# Altium PCB PCB1.PcbDoc
Units mil, origin at the board's own origin, x right, y up, seen from the top; angles counter-clockwise.
Board outline 6000 x 4000 mil, 2 copper layers (Top Layer, Bottom Layer); 80 components, 58 nets, 267 pads, 0 vias.
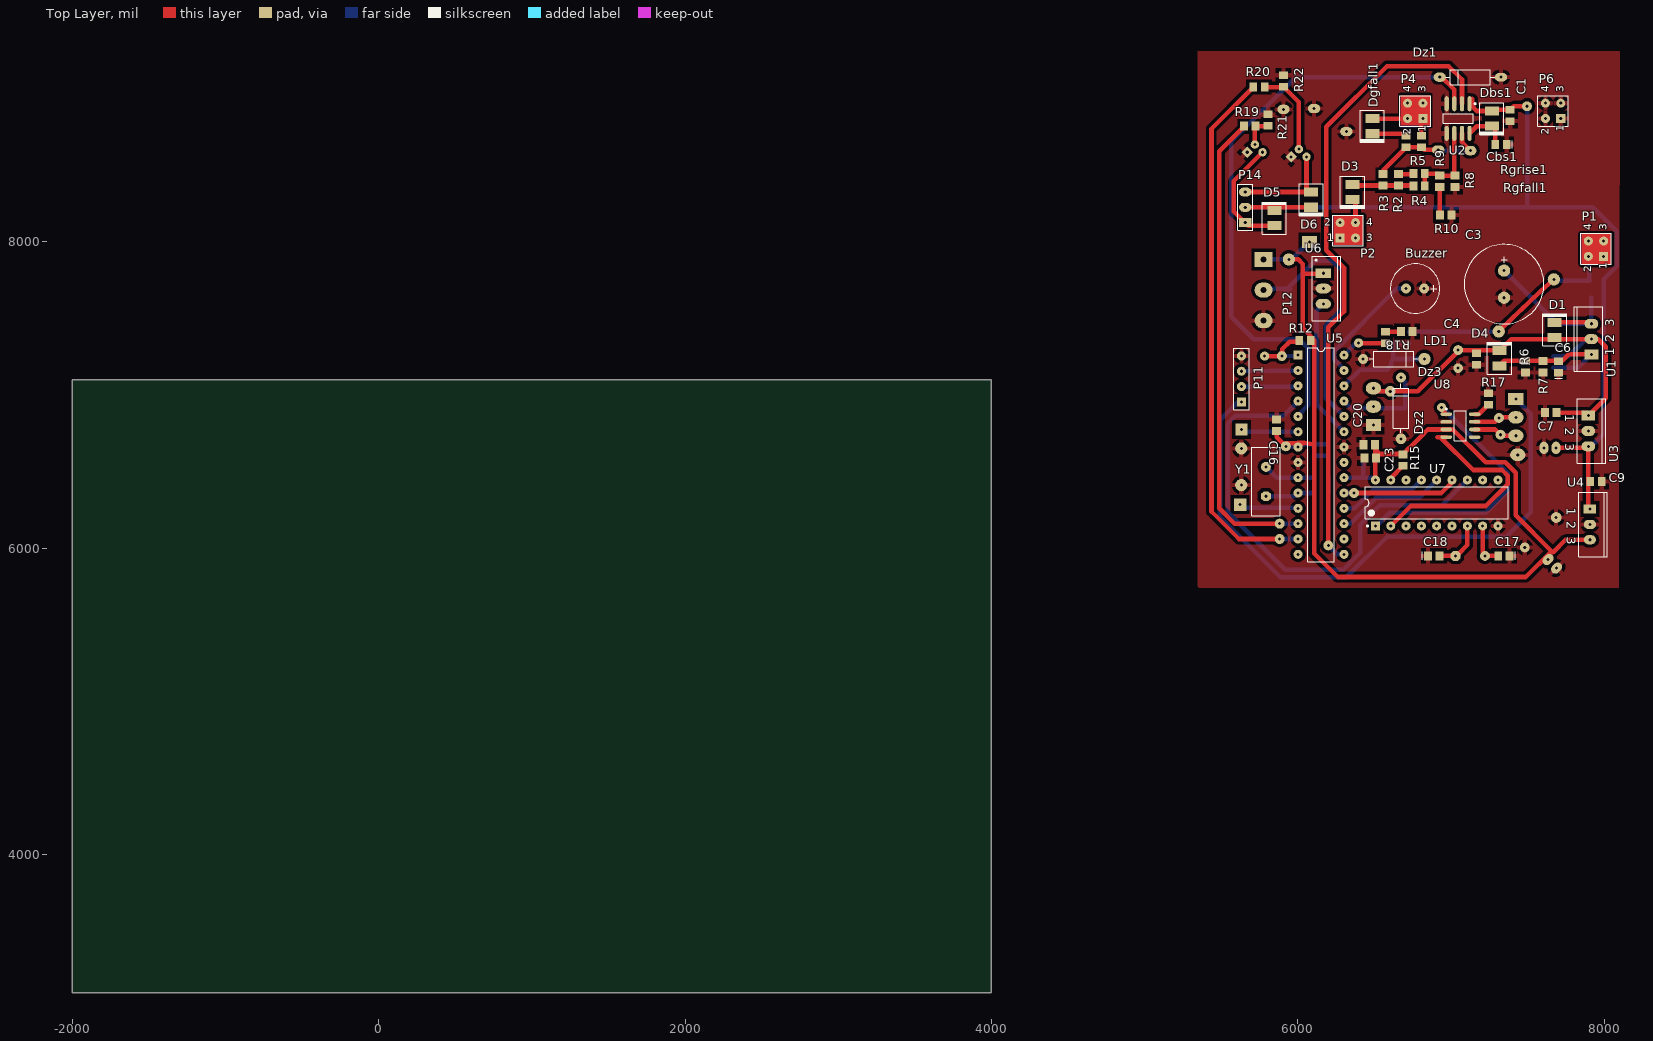
[diagram p0: Top Layer view]
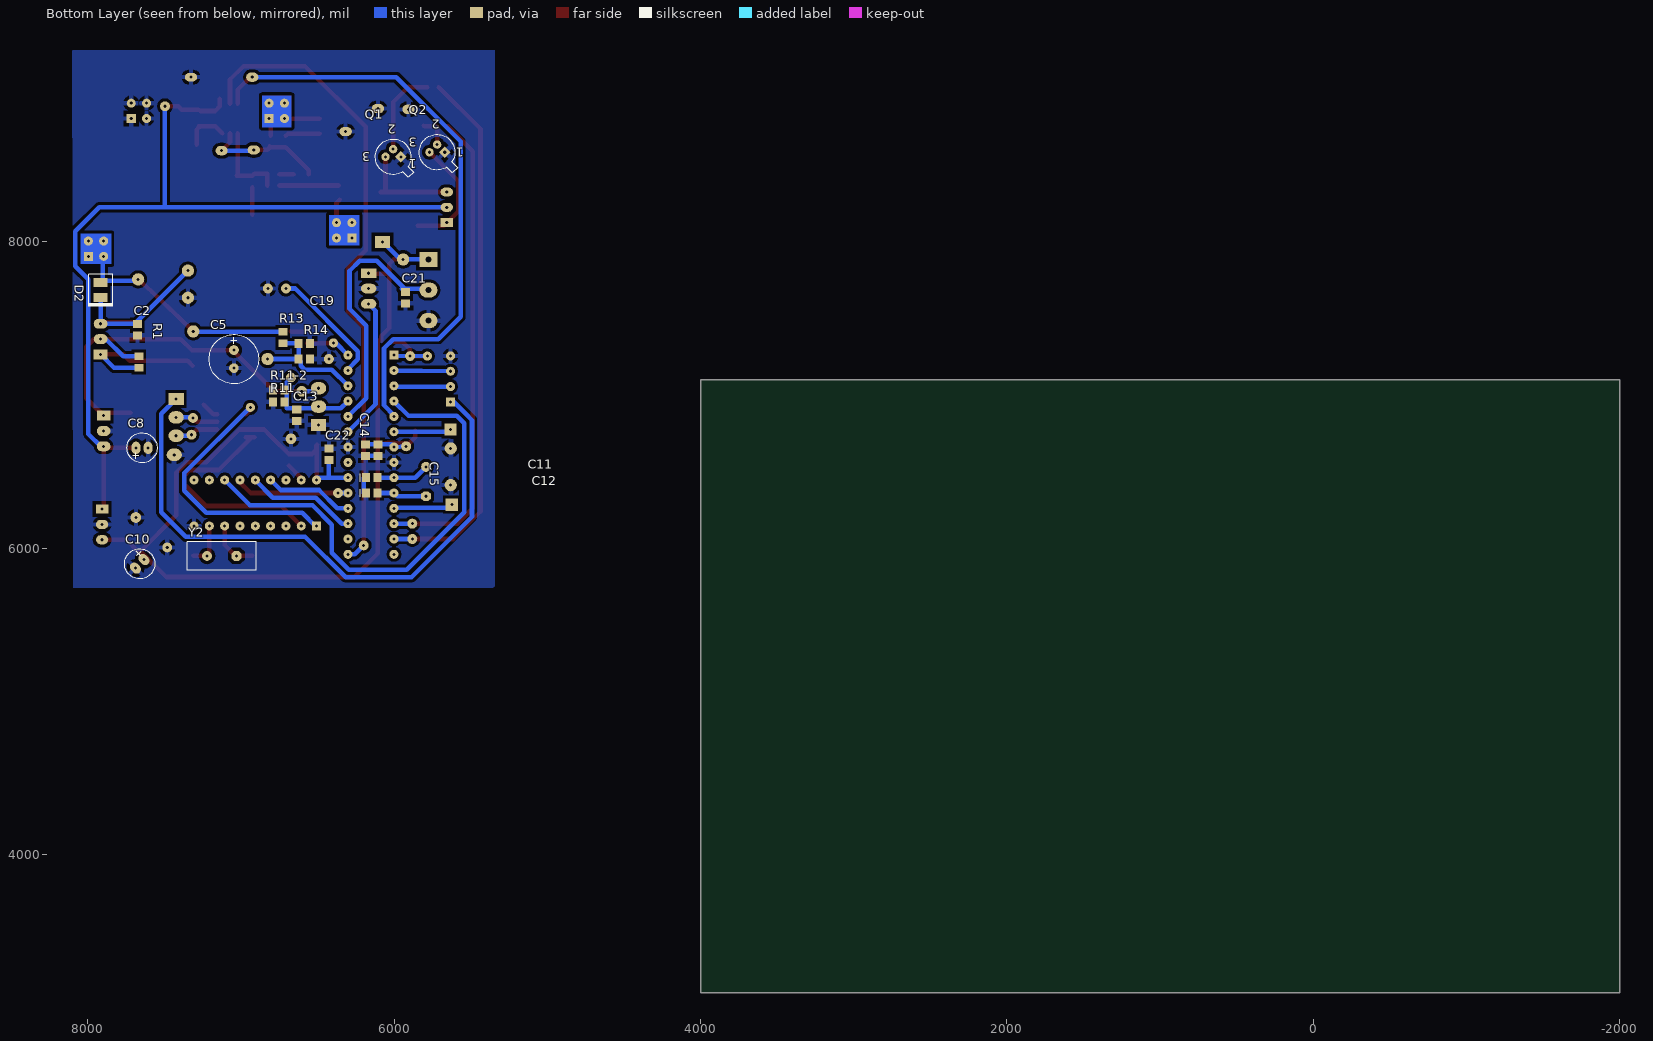
[diagram p1: Bottom Layer view, seen from below]

## Layer stack, top to bottom
Top Layer: signal copper 1.4
Dielectric: dielectric 12.6, FR-4, Dk 4.8
Bottom Layer: signal copper 1.4

## Board outline
-2000.86,3098.13 3999.14,3098.13 3999.14,7098.13 -2000.86,7098.13

## Design rules (kind name [scope] priority, off if disabled: settings)
Clearance [All] p1: gap=20
Height [All] p1: minheight=0 maxheight=10000 prefheight=500
HoleSize [All] p1: absolutevalues=TRUE maxlimit=100 minlimit=20 maxpercent=80.000 minpercent=20.000
PolygonConnect [All] p1: connectstyle=Relief reliefconductorwidth=30 reliefentries=4 polygonreliefangle="90 Angle"
RoutingVias [All] p1: holewidth=28 width=50 viastyle="Through Hole" minholewidth=28 minwidth=50 maxholewidth=28 maxwidth=50
SilkToSilkClearance [All] p1: silktosilkclearance=0
SilkscreenOverComponentPads [All] p1: minsilkscreentomaskgap=0
SolderMaskExpansion [All] p1: expansion=4
Width [All] p1: maxlimit=30 minlimit=30 preferedwidth=30 minimp=50.000000 maximp=50.000000 favimp=50.000000
24 further rules are at their usual default settings.

## Components (designator, comment, footprint, x,y, rotation, side; value= is the part's Value field where it differs from the comment)
Buzzer "Buzzer" CapEltr-Rad4.1-Dpp3.0#1 6707.09,7695 r0 top
C1 "Cap" 6-0805 7387.09,8825 r270 top
C2 "Cap" 6-0805 7677.09,7425 r90 bottom
C3 "Cap" CapEltr-Rad6.6-Dpp4.5 7347.09,7635 r90 top
C4 "Cap" 6-0805 7167.09,7235 r90 top
C5 "Cap" CapEltr-Rad4.1-Dpp3.0#2 7047.09,7175 r90 bottom
C6 "Cap" 0805 7702.58,7182.83 r90 top
C7 "Eltr" 6-0805 7652.29,6884.98 r0 top
C8 "Cer" 1u25v 7607.09,6655 r0 bottom
C9 "Eltr" 6-0805 7947.09,6435 r180 top
C10 "Cer" 1u25v 7690,5870 r135 bottom
C11 "Cap" 0805 6147.09,6460 r180 bottom
C12 "Cap" 0805 6147.09,6360 r180 bottom
C13 "Cap" 6-0805 6636.62,6866.81 r270 bottom
C14 "Cap" 6-0805 6187.09,6640 r270 bottom
C15 "Cap" 6-0805 6107.09,6640 r270 bottom
C16 "Cap" 6-0805 5862.58,6802.83 r90 top
C17 "Cap" 0805 7346.14,5949.45 r180 top
C18 "Cap" 0805 6888.73,5949.45 r0 top
C19 "Cap" 6-0805 6587.09,7235 r180 bottom
C20 "Cap" 6-0805 6467.09,6675 r0 top
C21 "Cap" 6-0805 5927.09,7635 r270 bottom
C22 "Cap" 6-0805 6427.09,6612.4 r270 bottom
C23 "Cap" 6-0805 6472.57,6588.19 r0 top
Cbs1 "Cer" C0805 7327.09,8635 r180 top
D1 "BYD77" SOD87 7677.09,7425 r90 top
D2 "Diode 1N4002" SOD87 7917.09,7685 r270 bottom
D3 "BYD77" SOD87 6357.09,8325 r270 top
D4 "1N4002" SOD87 7317.09,7240 r90 top
D5 "1N4002" SOD87 5847.09,8155 r90 top
D6 "1N4002" SOD87 6087.09,8275 r270 top
Dbs1 "" SOD87 7267.09,8805 r270 top
Dgfall1 "BYD77" SOD87 6487.09,8755 r270 top
Dz1 "5V" diode-0.4#1 7127.09,9075 r180 top
Dz2 "5V" diode-0.4#2 6673.97,6913.98 r90 top
Dz3 "5V" DIODE-0.4 6627.09,7235 r0 top
LD1 "RED" 6-0805 6712.09,7415 r0 top
P1 "Header 2X2" HDR2X2 7997.09,7905 r90 top
P2 "Header 2X2" HDR2X2 6277.09,8025 r0 top
P4 "Header 2X2" HDR2X2 6817.09,8805 r90 top
P6 "Header 2X2" HDR2X2 7717.09,8805 r90 top
P11 "UART" HDR1X4 5632.09,6955 r90 top
P12 "WE-Terminal Blocks Screw Type 691103110003" t-block 5777.09,7685 r270 top
P14 "POWER RElAY" HDR1X3 5657.09,8125 r90 top
Q1 "2N2222" 22-03 6007.09,8555 r0 bottom
Q2 "2N2222" 22-03 5720.1,8585 r0 bottom
R1 "Res1" 6-0805 7667.09,7215 r270 bottom
R2 "1%" 6-0805 6657.09,8405 r90 top
R3 "1%" 6-0805 6557.09,8405 r90 top
R4 "1%" 6-0805 6792.09,8365 r0 top
R5 "1%" 6-0805 6792.09,8445 r0 top
R6 "Res1" 6-0805 7487.09,7185 r90 top
R7 "Res1" 6-0805 7602.09,7185 r90 top
R8 "1%" 6-0805 7027.09,8395 r270 top
R9 "1%" 6-0805 6927.09,8395 r270 top
R10 "1%" 6-0805 6967.09,8175 r180 top
R11 "Res1" 6-0805 6753.5,6955 r0 bottom
R11-2 "Res1" 6-0805 6753.97,7033.98 r0 bottom
R12 "Res1" 6-0805 6047.09,7355 r0 top
R13 "Res1" 6-0805 6727.09,7375 r270 bottom
R14 "Res1" 6-0805 6587.09,7335 r180 bottom
R15 "Res1" 6-0805 6687.09,6575 r270 top
R17 "Res1" 6-0805 7243.97,6973.98 r270 top
R18 "Res1" 6-0805 6572.09,7375 r270 top
R19 "Res1" 6-0805 5687.09,8755 r0 top
R20 "Res1" 6-0805 5747.09,9010 r180 top
R21 "Res1" 6-0805 5807.09,8795 r270 top
R22 "Res1" 6-0805 5907.09,9050 r270 top
Rgfall1 "Res1" 6-0805 6707.09,8655 r270 top
Rgrise1 "Res1" 6-0805 6807.09,8655 r270 top
U1 "LM317" TO-220AB#1 7917.09,7365 r90 top
U2 "IR2127S" SO8_M 7047.09,8805 r270 top
U3 "LM7815" TO-220AB#1 7897.09,6765 r270 top
U4 "LM7805" TO-220AB#2 7907.09,6155 r270 top
U5 "ATmega328p" 28P3 6152.09,6610 r270 top
U6 "LM35DT" TA03F 6167.09,7695 r270 top
U7 "MCP2515-E/P" PDIP300-P18 6907.09,6295 r90 top
U8 "MCP2551-E/P" SOIC-SN8_L 7062.09,6800 r0 top
Y1 "16MHz" BCY-W2/E4.7 5792.09,6435 r90 top
Y2 "16MHz" BCY-W2/E4.7 7126.14,5949.45 r0 bottom

## Footprints (in the part's own frame and the unit in brackets; to place one, negate y for a bottom-side part, rotate by r counter-clockwise, add the part's x,y. Pads: shape width x height; smd on the part's side, far side on the other; paste and mask are expansions set on the pad)
1u25v [mil]
  oval 58x80 hole 20: 1(0,0) 2(78.74,0)
  silkscreen extent -59,-98 138,98
6-0805 [mm] "Chip Resistor; Body 2 x 1.2 mm (LxW typ)"
  rect 1.3x1.5 smd: 1(-0.95,0) 2(0.95,0)
22-03 [mm] "Can; 3 Leads; Pin Circle Dia. 2.54 mm; Lead Dia. 0.48 mm (max)"
  rect 1.4x1.4 hole 0.508 rot 45: 1(-1.27,0)
  round 1.4 hole 0.508: 2(0,-1.27) 3(1.27,0)
  silkscreen extent -3.39,-2.95 2.95,3.39
28P3 [mm] "DIP; 28 Leads; Row Spacing 7.62 mm; Pitch 2.54 mm"
  rect 1.5x1.5 hole 0.508: 1(-16.51,-3.81)
  round 1.5 hole 0.508: 2(-13.97,-3.81) 3(-11.43,-3.81) 4(-8.89,-3.81) 5(-6.35,-3.81) 6(-3.81,-3.81) 7(-1.27,-3.81) 8(1.27,-3.81) 9(3.81,-3.81) 10(6.35,-3.81) 11(8.89,-3.81) 12(11.43,-3.81) 13(13.97,-3.81) 14(16.51,-3.81) 15(16.51,3.81) 16(13.97,3.81) 17(11.43,3.81) 18(8.89,3.81) 19(6.35,3.81) 20(3.81,3.81) 21(1.27,3.81) 22(-1.27,3.81) 23(-3.81,3.81) 24(-6.35,3.81) 25(-8.89,3.81) 26(-11.43,3.81) 27(-13.97,3.81) 28(-16.51,3.81)
  silkscreen extent -17.78,-2.23 17.78,2.23
0805 [mm] "Chip Capacitor; Body 2.0 x 1.2 mm (LxW typ)"
  rect 1.3x1.5 smd: 1(-0.95,0) 2(0.95,0)
  silkscreen extent -1.9,-0.65 -1.9,0.65
BCY-W2/E4.7 [mil] "Quartz Crystal, Thru-Hole; 2 Leads; Body 11.35 x 4.65 x 13.46 mm (LxWxH max)"
  oct 65x65 hole 20: 1(-96.06,0)
  round 65 hole 20: 2(96.06,0)
  silkscreen extent -224,-93 224,93
C0805 [mm] "Chip Capacitor; Body 2.0 x 1.2 mm (LxW typ)"
  rect 1.3x1.5 smd: 1(-0.95,0) 2(0.95,0)
  silkscreen extent -1.9,-0.65 -1.9,0.65
CapEltr-Rad4.1-Dpp3.0#1 [mil] "Capacitor Eletrolitico Radial 4.1mm com 3.0mm entre pinos"
  round 65 hole 20: 1(0,0) 2(118.11,0)
  silkscreen extent -102,-161 220,161
CapEltr-Rad4.1-Dpp3.0#2 [mil] "Capacitor Eletrolitico Radial 4.1mm com 3.0mm entre pinos"
  round 62.99 hole 20: 1(0,0)
  round 65 hole 20: 2(118.11,0)
  silkscreen extent -102,-161 220,161
CapEltr-Rad6.6-Dpp4.5 [mil] "Capacitor Eletrolitico Radial 6.6mm com 4.5mm entre pinos"
  round 80 hole 20: 1(0,0) 2(177.17,0)
  silkscreen extent -171,-260 348,260
diode-0.4#1 [mil] "Diode, Thru-Hole; 2 Leads; 0.4 in Pin Spacing"
  oval 80x55.12 hole 20: 1(-200,0)
  oval 80x60 hole 20: 2(200,0)
  silkscreen extent -160,-50 160,50
diode-0.4#2 [mil] "Diode, Thru-Hole; 2 Leads; 0.4 in Pin Spacing"
  round 70 hole 20: 1(-200,0)
  round 65 hole 20: 2(200,0)
  silkscreen extent -160,-50 160,50
DIODE-0.4 [mil] "Diode, Thru-Hole; 2 Leads; 0.4 in Pin Spacing"
  round 65 hole 20: 1(-200,0)
  round 80 hole 20: 2(200,0)
  silkscreen extent -160,-50 160,50
HDR1X3 [mil] "Connector; Header; 3 Position"
  rect 59.06x80 hole 20: 1(0,0)
  oval 59.06x80 hole 20: 2(100,0) 3(200,0)
  silkscreen extent -50,-50 250,50
HDR1X4 [mm] "Connector; Header; 4 Position"
  rect 1.5x1.5 hole 0.508: 1(0,0)
  round 1.5 hole 0.508: 2(2.54,0) 3(5.08,0) 4(7.62,0)
  silkscreen extent -1.27,-1.27 8.89,1.27
HDR2X2 [mm] "Connector; Header; 2x2 Position"
  rect 1.5x1.5 hole 0.508: 1(0,0)
  round 1.5 hole 0.508: 2(0,2.54) 3(2.54,0) 4(2.54,2.54)
  silkscreen extent -1.27,-1.27 3.81,3.81
PDIP300-P18 [mm] "DIP, 18-Leads, Row Spacing 7.62mm, Pitch 2.54mm, Body 22.9x6.6mm"
  rect 1.5x1.5 hole 0.508: 1(-3.81,10.16)
  round 1.5 hole 0.508: 2(-3.81,7.62) 3(-3.81,5.08) 4(-3.81,2.54) 5(-3.81,0) 6(-3.81,-2.54) 7(-3.81,-5.08) 8(-3.81,-7.62) 9(-3.81,-10.16) 10(3.81,-10.16) 11(3.81,-7.62) 12(3.81,-5.08) 13(3.81,-2.54) 14(3.81,0) 15(3.81,2.54) 16(3.81,5.08) 17(3.81,7.62) 18(3.81,10.16)
  silkscreen extent -3.93,-11.85 2.65,11.85, body extent -3.6,-11.8 3.6,11.8, height 5.34
SO8_M [mm] "8-Pin Small Outline Integrated Circuit 1.27 mm Pitch, IPC Low Density"
  oval 2.5x0.7 smd: 1(-2.45,1.905) 2(-2.45,0.635) 3(-2.45,-0.635) 4(-2.45,-1.905) 5(2.45,-1.905) 6(2.45,-0.635) 7(2.45,0.635) 8(2.45,1.905)
  silkscreen extent -2.57,-2.5 0.8,2.93, body extent -2,-2.5 2,2.5, height 1.75
SOD87 [mm]
  rect 1.5x2.3 smd: A(-1.253,0) K(1.253,0)
  silkscreen extent -2.65,-2.01 2.65,2.01
SOIC-SN8_L [mm] "SOIC, 8-Leads, Body 4.9x3.8mm, Pitch 1.27mm, IPC High Density"
  oval 1.9x0.6 smd: 1(-2.35,1.905) 2(-2.35,0.635) 3(-2.35,-0.635) 4(-2.35,-1.905) 5(2.35,-1.905) 6(2.35,-0.635) 7(2.35,0.635) 8(2.35,1.905)
  silkscreen extent -2.47,-2.5 1,2.88, body extent -2,-2.5 2,2.5, height 1.75
t-block [mm]
  rect 2.5x3 hole 1 unplated: 1(-5.08,0)
  oval 2.5x3 hole 1 unplated: 2(0,0) 3(5.08,0)
TA03F [mil] "TO, Thru-Hole, Vertical, Heatsink Mounted; 3 In-Line Leads; Pitch 2.54 mm"
  rect 60x100 hole 20: 1(-100,0)
  oval 62.99x100 hole 20: 2(0,0) 3(100,0)
  silkscreen extent -211,-73 211,112, body extent -213,-75 213,114, height 764
TO-220AB#1 [mil] "TO, Thru-Hole, Vertical, Heatsink Mounted; 3 In-Line Leads; Pitch 2.54 mm"
  rect 65x90 hole 20: 1(-100,0)
  oval 65x90 hole 20: 2(0,0) 3(100,0)
  silkscreen extent -211,-73 211,112
TO-220AB#2 [mil] "TO, Thru-Hole, Vertical, Heatsink Mounted; 3 In-Line Leads; Pitch 2.54 mm"
  rect 60x80 hole 20: 1(-100,0)
  oval 60x80 hole 20: 2(0,0) 3(100,0)
  silkscreen extent -211,-73 211,112

## Part data
Buzzer: "Magnetic Transducer Buzzer"
C1 C2 C3 C4 C5 C6 C13 C14 C15 C16 C19 C20 C21 C22 C23: "Capacitor"
C7 C8 C9 C10 Cbs1: library part Cap, "Capacitor"
C11 C12 C17 C18: library part "Cap Semi", "Capacitor (Semiconductor SIM Model)"
D1 D3 D4 D5 D6 Dbs1 Dgfall1: library part "Diode 1N4002", "1 Amp General Purpose Rectifier"
D2: "1 Amp General Purpose Rectifier"
Dz1 Dz2 Dz3: library part "D Zener", "Zener Diode"
LD1: library part LED, "Diodo Emissor de Luz"
P1 P2 P4 P6: "Header, 2-Pin, Dual row"
P11: library part "Header 4", "Header, 4-Pin"
P12: "WR-TBL 3.50 mm Wire Protector system"
P14: library part "Header 3", "Header, 3-Pin"
Q1 Q2: "General Purpose Transistor NPN Silicon"
R1 R6 R7 R11 R11-2 R12 R13 R14 R15 R17 R18 R19 R20 R21 R22 Rgfall1 Rgrise1: "Resistor"
R2 R3 R4 R5 R8 R9 R10: library part Res1, "Resistor"
U1: library part L7805ACV, "Precision 1A Regulator"
U2: "Current Sensing Single Channel Driver"
U3 U4: library part µA7805CKC, "Positive-Voltage Regulator"
U5: library part ATmega8-16PI, "8-Bit AVR Microcontroller with 8K Bytes of In-System Programmable Flash Memory"
U6: "Precision Centigrade Temperature Sensor"
U7: "Stand-Alone CAN Controller With SPI Interface, 18-Pin PDIP, Extended Temperature"
U8: "High-Speed CAN Transceiver, 8-Pin PDIP, Extended Temperature"
Y1 Y2: library part XTAL, "Crystal Oscillator"

## Free pads (board coordinates)
  round 60 hole 20: 0(5783.97,7253.98) 3(6939.69,6919.08) 9(6397.09,7340)
  round 65 hole 20: 0(5882.09,6160) 0(7497.09,8885) 1(5882.09,6060) 2(5896.14,7253.98) 3(5922.09,6665) 4(7482.09,6005) 7(6199.4,6018.07) 8(6367.26,6360) 16(7313.71,6850.57) 17(7323.71,6740.57)
  oval 80x60 hole 20: 0(5907.09,8865) 0(6317.09,8720) 1(6107.09,8870) 1(6917.09,8600) 2(7127.09,8595)
  rect 100x80 hole 20: 0(6076.14,7999.45) 0(7423.97,6973.98) 6(6493.97,6803.98)
  round 80 hole 20: 0(7672.09,7755) 1(7312.09,7415) 4(5942.09,7885) 12(5631.34,6651.35) 14(5631.34,6411.35)
  oval 100x80 hole 20: 1(7423.97,6853.98) 2(7423.97,6733.98) 3(7436.14,6609.45) 4(6493.97,6923.98) 5(6493.97,7043.98)
  round 70 hole 20: 3(7687.09,6200) 11(6603.97,7023.98)
  rect 80x80 hole 20: 13(5632.09,6775) 15(5623.97,6283.98)

## Nets (pads, with @x,y where several pads share a name; then routed paths per layer and width w, separated by ;. In a path a pad name is that pad's centre, name@x,y a point inside that pad or via, vN(x,y) a via of type N, cw(c..) or ccw(c..) an arc to the next point about the centre after c; other vN are vias at no path point)
+5V: C10.2 C14.1 C15.1 C16.1 C20.2 C22.2 C23.2 P12.1 pad.0@6076.14,7999.45 pad.3@5922.09,6665 pad.4@5942.09,7885 R12.2 R15.1 U4.3 U5.7 U5.20 U6.1 U7.18 U8.3 | length 7486.7
  Top Layer w30: C16.1 5862.58,6724.52 pad.3@5922.09,6665 ; pad.3@5922.09,6685 6001.56,6686.59 6042.09,6687.4 ; pad.4@5942.09,7885 6002.09,7885 6032.09,7855 6032.09,7437.21 6084.5,7384.81 R12.2@6084.5,7360.2 ; U5.7@6019.5,6677.4 6042.09,6687.4 ; 6032.09,7792.56 U6.1@6167.09,7792.56 ; R12.2 R12.2@6084.5,7360.2 ; R12.2@6087.09,7357.6 R12.2@6084.5,7360.2 ; R12.2@6107.09,7357.6 6107.09,6677.4 ; C20.2 6509.97,6669.53 6509.97,6641.81 6536.78,6615 6689.69,6615 6729.02,6654.33 ; U7.18 C20.2@6507.09,6669.53 ; R15.1 6795.89,6721.2 ; 6824.69,6750 6795.89,6721.2 ; 7662.93,5973.74 7422.09,6214.58 7422.09,6491.97 7354.06,6560 7226.37,6560 7011.37,6775 U8.3 6849.69,6775 6795.89,6721.2 ; U4.3 7748.35,6055 7667.09,5973.74 7650.83,5973.74 7488.83,5811.73 6260.36,5811.73 6107.09,5965 6107.09,6677.4 ; 6042.09,6687.4 6078.96,6681.73 6107.09,6677.4
  Bottom Layer w30: P12.1 pad.4@5942.09,7885 ; pad.3@5922.09,6665 U5.7 ; pad.4@5942.09,7902.53 pad.4@5942.09,7885 ; U5.7@6019.5,6677.4 C15.1 C14.1 ; pad.0@6076.14,7999.45 5961.69,7885 pad.4@5942.09,7885 ; U5.20 6427.09,6460 ; C22.2 6427.09,6460 ; U7.18 6507.09,6460 6427.09,6460
+15V: C1.1 C8.2 C9.2 D5.K D6.K Dbs1.A P14.2 pad.0@7497.09,8885 U2.1 U3.3 U4.1 | length 6108.3
  Top Layer w30: P14.2 D6.K@6087.09,8225 ; 7139.53,8932.56 7139.53,8884.02 7169.21,8854.34 Dbs1.A ; Dbs1.A@7275.16,8862.4 C1.1 7409.69,8885 pad.0@7497.09,8885 ; C8.2@7685.71,6656.39 U3.3@7888.48,6656.39 ; U3.3@7888.48,6665 U3.3 U4.1@7897.09,6255
  Bottom Layer w30: P14.2 7926.59,8225 8082.09,8069.5 8082.09,7840.5 7997.37,7755.78 7997.37,6745.28 7917.09,6665 U3.3 ; 7497.09,8230 pad.0@7497.09,8885
+24V: C4.2 C5.2 C7.2 D1.A D4.K pad.5 pad.11 R1.1 U1.2 U3.1 | length 2742
  Top Layer w30: pad.5 6513.97,7023.98 pad.11 6784.54,7023.98 C5.2@7057.09,7296.53 ; 7082.58,7292.83 7320.59,7292.83 7392.76,7365 U1.2 7962.09,7365 8012.09,7315 8012.09,6980 U3.1 ; 7722.09,6885 U3.1@7887.09,6885
  Bottom Layer w30: pad.5 6513.97,7023.98 pad.11 ; R1.1 7769.5,7252.4 7882.09,7365 U1.2
+VBAT: D2.A P1.1 P1.2 P1.3 P1.4 pad.0@7672.09,7755 pad.1@7312.09,7415 R13.1 | length 1532.9
  Top Layer w30: pad.1@7322.09,7425 7582.09,7675 pad.0@7672.09,7755
  Bottom Layer w30: R13.1 7242.09,7412.4 ; pad.1@7289.5,7412.4 7242.09,7412.4 ; pad.1@7322.09,7425 7319.5,7412.4 7242.09,7412.4 ; pad.0@7672.09,7755 7682.09,7745 D2.A@7906.43,7745 ; D2.A@7902.09,7749.34 P1.2@7902.09,7910
DRAIN: D3.K P2.1 P2.2 P2.3 P2.4 | length 158.9
  Top Layer w30: D3.K 6377.09,8255.66 P2.4
FAULT: Dz1.2 U2.3 U5.5 | length 3955.8
  Top Layer w30: Dz1.2 6941.38,9075 7022.09,8994.29 U2.3
  Bottom Layer w30: U5.5 6002.09,6868.74 6066.62,6933.27 6066.62,7304.02 6005.65,7365 5712.09,7365 5567.09,7510 5567.09,8655 5987.09,9075 Dz1.2
GATE: Dgfall1.A P4.1 P4.2 P4.3 P4.4 Rgrise1.1 | length 346.1
  Top Layer w30: Dgfall1.A P4.2@6716.43,8804.34 ; Rgrise1.1 6807.09,8795 P4.1
NetBuzzer_1: Buzzer.1 U5.27 | length 792.1
  Bottom Layer w30: U5.27 6302.09,7168.74 6237.57,7233.27 6237.57,7286.73 6645.84,7695 Buzzer.1
NetC2_2: C2.2 C3.2 D1.K D2.K U1.3 | length 1142.1
  Top Layer w30: D1.K 7907.76,7474.34 U1.3
  Bottom Layer w30: C3.2 7677.09,7482.17 C2.2 7679.69,7465 U1.3 D2.K
NetC6_2: C6.2 D4.A R1.2 R6.2 R7.2 U1.1 | length 917
  Top Layer w30: D4.A 7348.83,7222.4 R6.2 R7.2 7727.09,7222.4 7769.69,7265 U1.1
  Bottom Layer w30: R1.2 7829.69,7177.6 U1.1
NetC11_2: C11.2 U5.9 Y1.2 | length 331.3
  Bottom Layer w30: Y1.2 5863.16,6460 U5.9 C11.2@6093.94,6460
NetC12_2: C12.2 U5.10 Y1.1 | length 310.6
  Bottom Layer w30: Y1.1 5981.03,6338.94 U5.10 C12.2@6093.94,6360
NetC13_1: C13.1 Dz2.2 pad.4@6493.97,6923.98 R11-2.1 R11.1 U5.25 | length 634.2
  Bottom Layer w30: U5.25 6349.69,6912.4 6407.09,6912.4 6587.09,6912.4 6702.95,6912.4 6702.95,7085 Dz2.2
NetC17_2: C17.2 U7.8 Y2.2 | length 260.8
  Top Layer w30: Y2.2@7207.09,5975 U7.8 ; Y2.2 C17.2@7312.99,5949.45
NetC18_2: C18.2 U7.7 Y2.1 | length 312.3
  Top Layer w30: C18.2@6927.09,5949.45 Y2.1@7005.48,5949.45 ; Y2.1@7020.81,5964.78 7051.47,5964.78 7107.09,6020.41 U7.7
NetC19_1: C19.1 Dz3.2 R13.2 R14.1 U5.26 | length 815
  Bottom Layer w30: U5.26 6407.09,7165 6584.31,7165 6610.28,7190.98 6610.28,7220.79 C19.1 ; R14.1 C19.1 ; R14.1@6627.09,7337.6 R13.2 ; Dz3.2 C19.1
NetC21_1: C21.1 P12.2 U5.24 | length 1700.8
  Bottom Layer w30: P12.2@5784.81,7692.72 C21.1@5952.32,7692.72 ; C21.1 5927.09,7690.12 5927.6,7690.12 6115.04,7877.56 6224.03,7877.56 6292.09,7809.49 6292.09,7562.56 6182.09,7452.56 6182.09,6980 U5.24
NetCbs1_2: Cbs1.2 Dbs1.K U2.8 | length 306.5
  Top Layer w30: U2.8 7169.21,8755.66 Dbs1.K ; Dbs1.K@7275.16,8755.66 Dbs1.K ; Cbs1.2@7289.69,8638.94 Cbs1.2 7289.69,8733.06 Dbs1.K
NetCs1_2: 
NetD3_1: D3.A R2.1 R3.1 R4.1 | length 388.3
  Top Layer w30: D3.A@6363.83,8367.6 R3.1 R2.1 R4.1@6752.09,8367.6
NetD5_1: D5.A P14.1 Q2.3 | length 777.2
  Top Layer w30: P14.1@5638.34,8143.75 P14.1 5655.37,8125 5582.09,8198.27 5582.09,8397 Q2.3 Q2.3@5762.96,8577.86 ; P14.1@5676.43,8105.66 D5.A
NetD6_1: D6.A P14.3 Q1.3 | length 660.3
  Top Layer w30: P14.3 6086.43,8325 D6.A ; D6.A@6057.09,8325 Q1.3
NetDgfall1_2: Dgfall1.K Rgfall1.1 | length 225.5
  Top Layer w30: Dgfall1.K 6693.83,8705.66 Rgfall1.1
NetDS1_1: 
NetLD1_1: LD1.1 R18.1 | length 103.7
  Top Layer w30: R18.1 6672.09,7412.4 LD1.1
NetP7_1: 
NetP7_2: 
NetP8_1: 
NetP9_1: pad.13 U5.6 | length 376.2
  Bottom Layer w30: pad.13 5647.09,6760 U5.6
NetP10_1: pad.15 U5.11 | length 365
  Bottom Layer w30: pad.15@5632.09,6265 U5.11@5997.09,6265
NetP11_2: P11.2 U5.3 | length 365
  Bottom Layer w30: P11.2 U5.3@5997.09,7055
NetP11_3: P11.3 U5.2 | length 370
  Bottom Layer w30: P11.3 U5.2
NetP13_2: pad.1@7423.97,6853.98 pad.16 U8.7 | length 367
  Top Layer w30: U8.7 7288.14,6825 pad.16 ; pad.16@7337.12,6853.98 pad.1@7423.97,6853.98
  Bottom Layer w30: pad.16 7337.12,6853.98 pad.1@7423.97,6853.98
NetP13_3: pad.2@7423.97,6733.98 pad.17 U8.6 | length 385.5
  Top Layer w30: U8.6 7289.28,6775 pad.17 7350.3,6733.98 pad.2@7423.97,6733.98
  Bottom Layer w30: pad.17 7350.3,6733.98 pad.2@7423.97,6733.98
NetQ1_2: Q1.2 R20.1 R22.2 | length 569
  Top Layer w30: R20.1 R22.2@5904.5,9010 ; R22.2 6007.09,8912.6 Q1.2
NetQ2_2: Q2.2 R19.2 R21.2 | length 205.5
  Top Layer w30: Q2.2 5720.1,8750.6 R19.2 5804.5,8755 R21.2
NetR2_2: R2.2 R5.1 | length 95
  Top Layer w30: R2.2 R5.1@6752.09,8442.4
NetR3_2: pad.1@6917.09,8600 pad.2@7127.09,8595 R3.2 Rgfall1.2 Rgrise1.2 U2.7 | length 817.2
  Top Layer w30: R3.2@6557.09,8447.02 R3.2 6557.09,8467.6 Rgfall1.2 Rgrise1.2 ; Rgrise1.2@6813.83,8624.33 Rgrise1.2 ; pad.1@6917.09,8600 6824.69,8600 Rgrise1.2 ; U2.7 7072.09,8650 pad.2@7127.09,8595
  Bottom Layer w30: pad.1@6917.09,8600 6922.09,8595 pad.2@7127.09,8595
NetR4_2: R4.2 R5.2 R8.1 R9.1 U2.6 | length 554
  Top Layer w30: R4.2 R5.2 6914.5,8445 R9.1 R8.1 ; R8.1@7022.09,8437.4 U2.6
NetR9_2: R9.2 R10.2 | length 180
  Top Layer w30: R10.2@6927.09,8177.6 R9.2
NetR12_1: pad.0@5783.97,7253.98 pad.2@5896.14,7253.98 R12.1 U5.1 | length 527.8
  Top Layer w30: pad.0@5783.97,7253.98 pad.2@5896.14,7253.98 ; pad.2@5911.07,7253.98 pad.2@5896.14,7253.98 ; R12.1@5994.5,7355 6002.09,7347.4 5947.4,7347.4 5900,7300 5900,7257.84 pad.2@5896.14,7253.98
  Bottom Layer w30: pad.0@5783.97,7253.98 5784.99,7255 5896.14,7253.98 5997.09,7255 U5.1
NetR15_2: R15.2 U7.17 | length 125.7
  Top Layer w30: U7.17 6607.09,6457.6 R15.2
NetR17_2: R17.2 U8.8 | length 114.9
  Top Layer w30: U8.8 7182.4,6875 R17.2
NetR18_2: pad.9 R18.2 U5.28 | length 280.5
  Top Layer w30: pad.9@6399.69,7337.4 R18.2@6567.09,7337.4
  Bottom Layer w30: U5.28 pad.9@6382.09,7340
NetR19_1: pad.0@5882.09,6160 R19.1 U5.12 | length 3118.8
  Top Layer w30: R19.1 5487.09,8592.4 5487.09,6260 5587.09,6160 pad.0@5882.09,6160
  Bottom Layer w30: pad.0@5882.09,6160 U5.12
NetR20_2: pad.1@5882.09,6060 R20.2 U5.13 | length 3522.9
  Top Layer w30: R20.2 5437.09,8737.4 5437.09,6239.29 5616.38,6060 pad.1@5882.09,6060
  Bottom Layer w30: pad.1@5882.09,6060 U5.13
NetU5_4: U5.4 U7.12 | length 3170.2
  Bottom Layer w30: U5.4 5907.09,6865 5592.09,6865 5542.09,6815 5542.09,6235 5917.09,5860 6297.09,5860 6407.09,5970 6407.09,6153.55 6533.54,6280 6942.09,6280 U7.12
NetU5_16: U5.16
NetU5_17: U5.17 U7.14 | length 723.1
  Bottom Layer w30: U5.17 6342.09,6160 6512.09,6330 6792.09,6330 U7.14
NetU5_18: U5.18 U7.15 | length 571.6
  Bottom Layer w30: U5.18@6312.09,6260 6371.38,6260 6491.38,6380 6742.09,6380 U7.15
NetU5_19: pad.8 U5.19 U7.13 | length 744.6
  Top Layer w30: pad.8 6937.09,6360 U7.13@7014.59,6437.5
  Bottom Layer w30: U5.19 pad.8
NetU5_23: U5.23 U6.3 | length 928.2
  Bottom Layer w30: U6.3 6122.09,7550 6122.09,6940 U5.23
NetU7_1: pad.3@6939.69,6919.08 U7.1 U8.1 | length 1731.8
  Top Layer w30: pad.3@6939.69,6919.08 6939.69,6904.89 U8.1
  Bottom Layer w30: U7.1@6515.84,6145 6600.84,6230 7227.09,6230 7371.62,6374.53 7371.62,6490.47 pad.3@6941.35,6920.74
NetU7_2: U7.2 U8.4 | length 1534.8
  Top Layer w30: U7.2 6737.09,6275 7228.35,6275 7371.62,6418.27 7371.62,6471.73 7333.35,6510 7145.41,6510 6930.41,6725 ; 6912.09,6725 U8.4
NetU7_16: U7.16
PWM: pad.7 U2.2 U5.15 | length 4203.5
  Top Layer w30: pad.7@6198.79,6018.07 6198.79,7441.81 6302.09,7545.12 6302.09,7830 6187.09,7945 6187.09,8752.02 6582.64,9147.56 6984.53,9147.56 7072.09,9060 U2.2 ; U5.15 U5.15@6302.09,5968.74
  Bottom Layer w30: pad.7 6257.47,5960 U5.15
SOURCE: Buzzer.2 C1.2 C2.1 C3.1 C4.1 C5.1 C6.1 C7.1 C8.1 C9.1 C10.1 C11.1 C12.1 C13.2 C14.2 C15.2 C16.2 C17.1 C18.1 C19.2 C20.1 C21.2 C22.1 C23.1 Cbs1.1 Dz1.1 Dz2.1 Dz3.1 LD1.2 P6.1 P6.2 P6.3 P6.4 P11.4 P12.3 pad.0@5907.09,8865 pad.0@6317.09,8720 pad.1@6107.09,8870 pad.3@7436.14,6609.45 pad.3@7687.09,6200 pad.4@7482.09,6005 pad.6 pad.12 pad.14 Q1.1 Q2.1 R6.1 R7.1 R8.2 R10.1 R11-2.2 R11.2 R14.2 R17.1 R21.1 R22.1 U2.4 U2.5 U3.2 U4.2 U5.8 U5.22 U6.2 U7.9 U8.2 | length 201.6
  Bottom Layer w30: C15.2 C14.2 ; C12.1@6200.24,6360 C11.1@6200.24,6460 ; pad.4@7482.09,6005 pad.4@7492.09,6005 ; C2.1@7667.69,7382.28 7673,7387.6 C2.1
VCC: P11.1 pad.0@7423.97,6973.98 | length 4023
  Bottom Layer w30: 5571.38,6915 5533.19,6876.81 ; P11.1 5611.38,6955 5533.19,6876.81 ; pad.0@7423.97,6973.98 7521.62,6876.33 7521.62,6234.53 7362.09,6075 6582.8,6075 6317.8,5810 5887.09,5810 5492.09,6205 5492.09,6835.71 5533.19,6876.81
pads on no net: U5.14 U5.21 U7.3 U7.4 U7.5 U7.6 U7.10 U7.11 U8.5

## Polygon pours and split planes (outlines as drawn)
SOURCE on Top Layer "Mechanical 15-No Net" (solid, remove dead copper, pour order 1000): 8102.09,9245 5345.63,9245 5345.63,5750.31 5351.07,5745.15 5356.51,5740 8096.66,5740
SOURCE on Bottom Layer "Mechanical 15-No Net" (solid, remove dead copper, pour order 1000): 8101.19,9250.57 5344.73,9250.57 5344.73,5750.89 5350.17,5745.73 5355.6,5740.57 8095.76,5740.57

## Other copper
Top Layer:
  rectangle net GATE: 6672.09,8760 6862.09,8955
  rectangle net +VBAT: 7852.09,7855.47 8046.62,8050
  rectangle net DRAIN: 6232.09,7980 6427.09,8170
Bottom Layer:
  region net GATE: 6862.09,8748 6862.09,8955 6672.09,8955 6672.09,8748
  rectangle net DRAIN: 6227.09,7975 6427.09,8175
  rectangle net +VBAT: 7847.09,7855 8047.09,8055

## Silkscreen, mask and mechanical layers (free items; w line width, h text height)
Mechanical 1:
  lines w10: 5352.09,5740 5352.09,9250 8102.09,9250 8102.09,5740 5352.09,5740

## Text inside footprints (layer, text, board x,y; h text height)
P1: Top Overlay "1" at 8017.09,7820 h50 r90; Top Overlay "2" at 7917.09,7800 h50 r90; Top Overlay "4" at 7917.09,8075 h50 r90; Top Overlay "3" at 8017.09,8075 h50 r90
P2: Top Overlay "1" at 6192.09,8005 h50; Top Overlay "2" at 6172.09,8105 h50; Top Overlay "4" at 6447.09,8105 h50; Top Overlay "3" at 6447.09,8005 h50
P4: Top Overlay "1" at 6837.09,8715 h50 r90; Top Overlay "2" at 6737.09,8700 h50 r90; Top Overlay "4" at 6737.09,8975 h50 r90; Top Overlay "3" at 6837.09,8975 h50 r90
P6: Top Overlay "1" at 7737.09,8720 h50 r90; Top Overlay "2" at 7637.09,8700 h50 r90; Top Overlay "4" at 7637.09,8975 h50 r90; Top Overlay "3" at 7737.09,8975 h50 r90
Q1: Bottom Overlay "1" at 5852.09,8540 h59.06 r180; Bottom Overlay "2" at 5989.65,8765.83 h59.05 r180; Bottom Overlay "3" at 6157.17,8584.21 h59.05 r180
Q2: Bottom Overlay "1" at 5547.66,8613.31 h59.06 r180; Bottom Overlay "2" at 5702.66,8795.83 h59.05 r180; Bottom Overlay "3" at 5852.09,8680 h59.05 r180
U1: Top Overlay "2" at 8067.68,7345.31 h59.06 r90; Top Overlay "1" at 8067.68,7255.16 h59.06 r90; Top Overlay "3" at 8067.68,7445.31 h59.06 r90
U3: Top Overlay "2" at 7746.5,6784.69 h59.06 r270; Top Overlay "1" at 7746.5,6874.84 h59.06 r270; Top Overlay "3" at 7746.5,6684.69 h59.06 r270
U4: Top Overlay "2" at 7756.5,6174.69 h59.06 r270; Top Overlay "1" at 7756.5,6264.84 h59.06 r270; Top Overlay "3" at 7756.5,6074.69 h59.06 r270